# Altium PCB Wireless_Receiver.PcbDoc
Units mil, origin at the board's own origin, x right, y up, seen from the top; angles counter-clockwise.
Board outline 650 x 943.8 mil, 2 copper layers (Top Layer, Bottom Layer), stack 61.756 mil thick; 23 components, 24 nets, 103 pads, 31 vias.
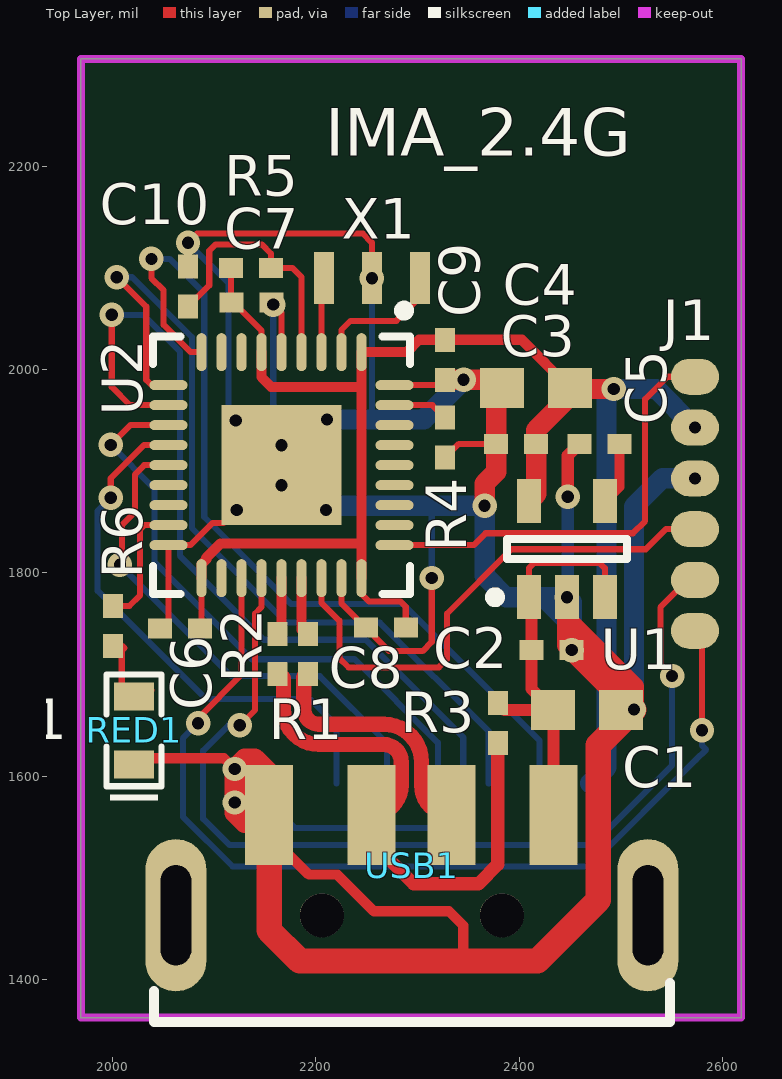
[diagram p0: Top Layer view]
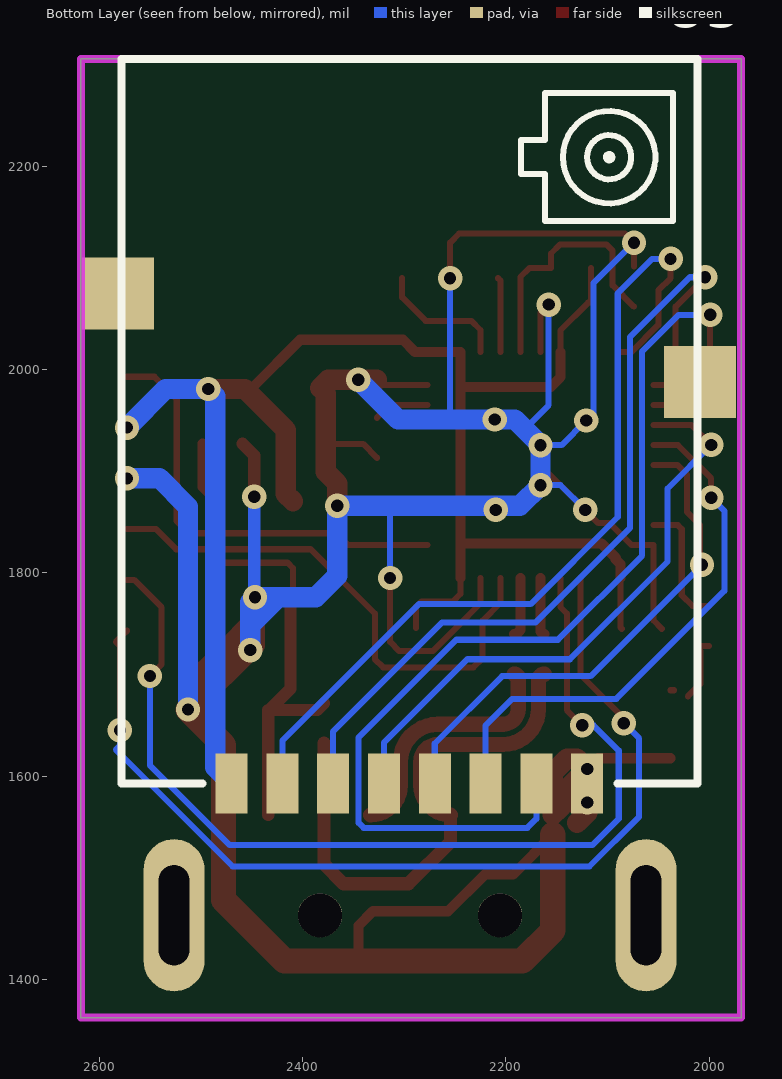
[diagram p1: Bottom Layer view, seen from below]

## Layer stack, top to bottom
Top Solder: solder mask 1, SM-001, Dk 4
Top Layer: signal copper 1.378
Dielectric 1: core 59, Core-043, Dk 4.3
Bottom Layer: signal copper 1.378
Bottom Solder: solder mask 1, SM-001, Dk 4

## Board outline
1968.5,1362.2 1968.5,2306 2618.5,2306 2618.5,1362.2

## Design rules (kind name [scope] priority, off if disabled: settings)
Clearance [All] p1: gap=5 ignorepadtopadclearanceinfootprint=FALSE
DiffPairsRouting [All] p1: maxlimit=5 minlimit=5 mostfreqgap=5 toplayer_minwidth=13 toplayer_maxwidth=16 toplayer_prefwidth=13 bottomlayer_minwidth=13 bottomlayer_maxwidth=16 bottomlayer_prefwidth=13 maxuncoupledlength=500
PolygonConnect [All] p1: connectstyle=Relief reliefconductorwidth=10 reliefentries=4 polygonreliefangle="90 Angle" airgapwidth=10
RoutingVias [All] p1: holewidth=12 width=24 viastyle="Through Hole" minholewidth=10 minwidth=20 maxholewidth=100 maxwidth=100
SolderMaskExpansion [All] p1: expansion=4 istentingtop=FALSE
Width [All] p1: maxlimit=100 minlimit=6 preferedwidth=10 minimp=50.000000 maximp=50.000000 favimp=50.000000
29 further rules are at their usual default settings.

## Classes and differential pairs
differential pair USBIN: +USBIN_P -USBIN_N

## Components (designator, comment, footprint, x,y, rotation, side; value= is the part's Value field where it differs from the comment)
C1 "10uF" Cap-0603-M 2467,1665 r180 top
C2 "104" Cap-0402-M 2432,1724 r180 top
C3 "104" Cap-0402-M 2397,1927 r0 top
C4 "10uF" Cap-0603-M 2416.46,1982 r0 top
C5 "10nF" Cap-0402-M 2479,1927 r0 top
C6 "104" Cap-0402-M 2066.31,1745 r0 top
C7 "104" Cap-0402-M 2136.32,2066 r180 top
C8 "104" Cap-0402-M 2268.68,1746 r0 top
C9 "104" Cap-0402-M 2327,2009.68 r90 top
C10 "104" Cap-0402-M 2074,2081.68 r270 top
J1 "DEBUG_POINT_6" DEBUG_POINT_6 2573,1868 r90 top
R1 "22R" Res-0402-M 2192,1720 r90 top
R2 "22R" Res-0402-M 2162,1720 r90 top
R3 "1K5" Res-0402-M 2379,1652 r90 top
R4 "10K" Res-0402-M 2327,1933 r270 top
R5 "10K" Res-0402-M 2136,2100 r180 top
R6 "4.7K" Res-0402-M 2000,1747.68 r90 top
RED1 "SYSTEM" LED_0603_R 2021,1645 r270 top
U1 "SPX3819" SOT23-5 2447,1823.24 r90 top
U2 "STM32F103T8U6" "STM-VFQFPN36_L _2" 2166,1906 r270 top locked
U3 "NRF24L01P" NRF24L01P 2295.09,1592.83 r90 bottom locked
USB1 "USB-A" USB_A/P_B 2433.9,1561.74 r0 top locked
X1 "XTAL-3P" "OSC 3213-3P" 2255,2090 r180 top

## Footprints (in the part's own frame and the unit in brackets; to place one, negate y for a bottom-side part, rotate by r counter-clockwise, add the part's x,y. Pads: shape width x height; smd on the part's side, far side on the other; paste and mask are expansions set on the pad)
Cap-0402-M [mm]
  rect 0.6x0.5 smd: 1(-0.5,0) 2(0.5,0)
  body extent -0.5,-0.25 0.5,0.25, height 0.5
Cap-0603-M [mm]
  rect 1.1x1 smd: 1(-0.85,0) 2(0.85,0)
  body extent -0.8,-0.4 0.8,0.4, height 0.6
DEBUG_POINT_6 [mm]
  oval 0.9x1.2 smd: 1(-3.175,0) 2(-1.905,0) 3(-0.635,0) 4(0.635,0) 5(1.905,0) 6(3.175,0)
LED_0603_R [mm]
  rect 0.7x1 smd: 1(-0.85,0) 2(0.85,0)
  silkscreen extent -1.4,-0.69 1.75,0.69, body extent -0.8,-0.4 0.8,0.41, height 0.61
NRF24L01P [mm]
  rect 1.8x1.8 smd: 0(10.033,-7.264) 0(12.247,7.288)
  rect 1.5x0.8 smd: 1(0,4.445) 2(0,3.175) 3(0,1.905) 4(0,0.635) 5(0,-0.635) 6(0,-1.905) 7(0,-3.175) 8(0,-4.445)
  silkscreen extent 0,-7.2 18.11,7.2, body extent 0,-7.21 18.03,7.19, height 0.8
"OSC 3213-3P" [mm] "CSTCE16M0V53-R0"
  rect 0.5x1.3 smd: 1(-1.2,0) 2(0,0) 3(1.2,0)
  body extent -1.61,-0.76 1.61,0.76, height 0.91
Res-0402-M [mm]
  rect 0.6x0.5 smd: 1(-0.5,0) 2(0.5,0)
  body extent -0.5,-0.25 0.5,0.25, height 0.38
SOT23-5 [mm]
  rect 1.1x0.6 smd: 1(-1.2,0.95) 2(-1.2,0) 3(-1.2,-0.95) 4(1.2,-0.95) 5(1.2,0.95)
  silkscreen extent -1.32,-1.5 0.25,1.92, body extent -1.4,-1.45 1.4,1.45, height 1.2
"STM-VFQFPN36_L _2" [mm] "QFN, 36-Leads, Body 6.13x6.13mm, Pitch 0.5mm, Thermal Pad 3x3mm, IPC High Density"
  oval 0.95x0.25 smd: 1(-2.825,2) 2(-2.825,1.5) 3(-2.825,1) 4(-2.825,0.5) 5(-2.825,0) 6(-2.825,-0.5) 7(-2.825,-1) 8(-2.825,-1.5) 9(-2.825,-2) 19(2.825,-2) 20(2.825,-1.5) 21(2.825,-1) 22(2.825,-0.5) 23(2.825,0) 24(2.825,0.5) 25(2.825,1) 26(2.825,1.5) 27(2.825,2)
  oval 0.25x0.95 smd: 10(-2,-2.825) 11(-1.5,-2.825) 12(-1,-2.825) 13(-0.5,-2.825) 14(0,-2.825) 15(0.5,-2.825) 16(1,-2.825) 17(1.5,-2.825) 18(2,-2.825) 28(2,2.825) 29(1.5,2.825) 30(1,2.825) 31(0.5,2.825) 32(0,2.825) 33(-0.5,2.825) 34(-1,2.825) 35(-1.5,2.825) 36(-2,2.825)
  rect 3x3 smd: 37(0,0)
  silkscreen extent -3.99,-3.21 3.21,3.21, body extent -3.07,-3.07 3.07,3.07, height 1
USB_A/P_B [mm]
  oval 1.524x3.81 hole 0.762 slot 2.5 at 90 deg: 0(-9.443,-2.508) 0(2.357,-2.508)
  round 1.1 hole 1.1: 0(-5.793,-2.508) 0(-1.293,-2.508)
  rect 1.2x2.5 smd: 1(0,0) 2(-2.556,0) 3(-4.556,0) 4(-7.112,0)
  silkscreen extent -9.99,-5.18 2.91,-4.21, body extent -9.91,-20.46 3.04,0.14, height 3.25

## Part data
C1 C2 C3 C4 C5 C6 C7 C8 C9 C10: library part CAP, "贴片陶瓷电容"
R1 R2 R3 R4 R5 R6: library part RES, "贴片电阻"
RED1: library part LED_SMD_RED, "发光二极管", Package=0603, SuppliersPartNumber=C2286, ComponentLink1Description=供应商链接, ComponentLink1URL=http://www.szlcsc.com/product/details_2659.html, Supplier=LC
U2: "ARM Cortex-M3 32-bit MCU, 64 KB Flash, 20 KB Internal RAM, 26 I/Os, 36-pin VFQFPN, -40 to 85 degC, Tray", I/Os (High Current)=26, Operating Frequency(F) (Processor speed) (MHz)=72, Supplier Part Number 1=497-11532-ND, Supply Voltage(Vcc) min (V)=2, A/D Converter="2x12-bit (10 Channel)", ComponentLink1Description="Manufacturer URL", ComponentLink1URL=http://www.st.com/web/en/home.html, ComponentLink2Description=Datasheet, ComponentLink2URL=http://www.st.com/st-web-ui/static/active/en/resource/technical/document/datasheet/CD00161566.pdf, ComponentLink3Description="Package Specification", ComponentLink3URL=http://www.st.com/st-web-ui/static/active/en/resource/technical/document/datasheet/CD00161561.pdf, Core="ARM Cortex-M3", DatasheetVersion="Rev. 16", FLASH Size (Prog) (kB)=64, Internal RAM Size (kB)=20, Mounting Technology="Surface Mount", PackageDescription="36-Pin Quad Flat No-Lead, 6 x 6 x 1.0 mm Body, 0.5 mm Pitch, Exposed Pad", PackageReference=VFQFPN36, PackageVersion="Rev. 16, 08/2013", Packing=Tray, PartNumber=STM32F103T8U6, Supplier 1=Digi-Key, Supplier 2=Farnell, Supplier 3=Newark, Supplier 4=Mouser, Supplier Part Number 2=1606329, Supplier Part Number 3=11N8298, Supplier Part Number 4=511-STM32F103T8U6
U3: "2.4G无线模块"
X1: "3脚无源晶振带电容"

## Via types
v1: diameter 24, hole 12, Top Layer to Bottom Layer, tented both sides, 31 vias

## Nets (pads, with @x,y where several pads share a name; then routed paths per layer and width w, separated by ;. In a path a pad name is that pad's centre, name@x,y a point inside that pad or via, vN(x,y) a via of type N, cw(c..) or ccw(c..) an arc to the next point about the centre after c; other vN are vias at no path point)
3V3: C3.2 C4.2 C6.2 C7.2 C8.2 C9.2 J1.5 R5.2 U1.5 U2.1 U2.6 U2.19 U2.27 U3.1 | length 1651.7
  Top Layer w6: C6.2 2087.26,1746.26 U2.19 ; R5.2 2116.31,2066.32 C7.2 2119,2066 2146.32,2038.68 U2.6 ; U2.27 2244.74,1779.26 2252,1772 2283,1772 2288.37,1766.63 C8.2
  Top Layer w10: U2.19 2087.26,1808.4 2092.02,1813.17 2092.02,1814.74 2106.28,1829 2244.74,1829 ; U2.6 2146.32,1992.68 2156,1983 2243.74,1983 2244.74,1984 ; U2.27 2244.74,1829 ; C4.2 2402.56,2029.37 C9.2 2301.37,2029.37 2289.22,2017.22 U2.1 2244.74,1984 ; 2244.74,1829 2244.74,1984
  Top Layer w20: U1.5 2416.69,1877.58 C3.2 2416.69,1940.69 2449.93,1973.93 2457,1981 v1(2493,1981)
  Bottom Layer w20: U3.1 2486,1608.75 2486,1767 2486,1974 v1(2493,1981) 2535,1981 v1(2573,1943)
5V: C1.2 C2.2 R3.2 U1.1 U1.3 USB1.1 | length 418.4
  Top Layer w6: U1.1 2409.6,1804.6 2415,1810 2479,1810 2484.4,1804.6 U1.3
  Top Layer w12: R3.2 2385.68,1665 C1.2 2433,1665 2412,1686 2412,1724 2412,1773.6 U1.1 ; USB1.1 C1.2@2433.9,1665.1
GND: C1.1 C2.1 C3.1 C4.1 C5.1 C6.1 C7.1 C8.1 C9.1 C10.1 J1.4 R4.2 RED1.2 U1.2 U2.5 U2.18 U2.26 U2.36 U2.37 U3.8 USB1.4 X1.2 | length 4347.1
  Top Layer w6: C6.1 2054.78,1753.15 U2.18 2076.26,1827.26 2098,1849 2109,1849 v1(2122,1862) U2.37 ; C10.1 v1(2074.01,2125.01) 2083,2134 2246,2134 2255,2125 v1(2255,2090) ; C7.1 v1(2157.97,2064.03) 2166,2056 U2.5 ; U2.26 2225.06,1769.94 C8.1 2272,1723 2305,1723 2314,1732 v1(2314,1795) ; U2.36 2321.74,1984.74 C9.1 ; R4.2 2340.69,1927 C3.1 ; C4.1@2377.32,1976.32 C4.1
  Top Layer w10: RED1.2@2037.99,1617.54 2109.46,1617.54 v1(2120,1607) ; USB1.4 2153.9,1542.1 2193,1503 2221,1503 2257,1467 2331,1467 2345,1453 2345,1418
  Top Layer w12: C2.1@2447,1728.68 v1(2451.68,1724) ; v1(2447.81,1874.89) 2447.81,1915.5 C5.1 ; C1.1@2500,1665.46 C1.1 2500.93,1665.46 2510.21,1665.46 v1(2513,1665.46)
  Top Layer w20: 2130,1554 2120,1564 v1(2120,1574) ; C9.1 v1(2345.32,1990) 2375,1990 C4.1 ; v1(2366,1866) 2366,1888 2377.32,1899.32 C3.1 C4.1@2377.32,1976.32 ; C2.1@2447,1728.68 2447,1753 ; v1(2447,1776) 2447,1753 ; C1.1@2510.21,1665.46 2505.11,1670.57 v1(2451.68,1724) 2477,1724 ; v1(2513,1665.46) 2513,1688 2477,1724 ; v1(2120,1574) v1(2120,1607) ; v1(2120,1574) 2141.64,1574 2148.22,1567.42 USB1.4 USB1.4@2153.9,1573.1 ; v1(2120,1607) 2130,1617 2140,1617 2153.9,1603.1 USB1.4@2153.9,1573.1 ; v1(2120,1607) 2147.32,1579.68 USB1.4@2153.9,1573.1 ; 2447,1753 2448,1753 2477,1724
  Top Layer w25: USB1.4@2153.9,1542.1 2153.9,1448.1 2184,1418 2345,1418 2418,1418 2478,1478 2478,1630.46 2506.5,1658.96 v1(2513,1665.46)
  Bottom Layer w6: v1(2074.01,2125.01) 2114,2085.01 2114,1957 v1(2121,1950) 2145.31,1925.69 v1(2166,1925.69) ; v1(2122,1862) 2146.32,1886.32 v1(2166,1886.32) ; v1(2157.97,2064.03) 2157.97,1965.03 2181.66,1941.34 ; v1(2255,2090) 2255,1954.66 2258.66,1951 ; v1(2314,1795) 2314,1865 2315,1866 ; v1(2447,1776) v1@2447.81,1776.81
  Bottom Layer w12: v1@2447.81,1776.81 v1(2447.81,1874.89)
  Bottom Layer w20: v1(2345.32,1990) 2306.32,1951 2258.66,1951 v1(2211,1951) 2191.31,1951 2181.66,1941.34 v1(2166,1925.69) v1(2166,1886.32) 2186.32,1866 2315,1866 v1(2366,1866) 2366,1797 2387,1776 2424,1776 ; v1(2451.68,1724) 2451.68,1748.32 ; v1(2513,1665.46) 2513,1865 2541,1893 v1(2573,1893) ; 2424,1776 2451.68,1748.32 ; 2424,1776 v1(2447,1776) 2451.68,1771.32 2451.68,1748.32
  other v1: 2210,1862
GPIO_CE_MCU_NRF: U2.9 U3.2 | length 867.7
  Top Layer w6: v1(2038,2109) 2038,2090.14 2050,2078.14 2050,2044 2076.78,2017.22 U2.9
  Bottom Layer w6: v1(2038,2109) 2056,2109 2090,2075 2090,1855 2175.68,1769.32 2285.69,1769.32 2420.09,1634.91 U3.2
GPIO_IRQ_NRF_MCU: U2.11 U3.7 | length 1069.9
  Top Layer w6: v1(1999,2054) 1999,1983 2016.94,1965.06 U2.11
  Bottom Layer w6: v1(1999,2054) 2030,2054 2066,2018 2066,1817 2148.81,1734.19 2248.81,1734.19 2345,1638 2345,1554 2340,1549 2179,1549 2170.09,1557.91 U3.7
GPIO_MCU_LED: R6.2 U2.17 | length 125.8
  Top Layer w6: R6.2 2016.37,1767.37 2027,1778 2027,1843 2030.94,1846.94 U2.17
NetC5_2: C5.2 U1.4 | length 62.4
  Top Layer w10: U1.4 2498.69,1884.78 C5.2
NetR4_1: R4.1 U2.35 | length 54.9
  Top Layer w6: U2.35 2314.63,1965.06 R4.1
NetR6_1: R6.1 RED1.1 | length 69.7
  Top Layer w6: R6.1 2009.65,1728 2011.62,1726.03 2008.8,1723.2 2008.8,1690.67 RED1.1 ; RED1.1@2034.53,1684.47 RED1.1@2037.99,1684.47
NRST_MCU_KEY: C10.2 R5.1 U2.4 | length 252.5
  Top Layer w6: C10.2 2095,2082.99 2095,2117 2101,2123 2147,2123 2155.68,2114.32 R5.1 2177,2100 2185.69,2091.32 U2.4
OSC_MCU_XTAL: U2.3 X1.3 | length 73.8
  Top Layer w6: U2.3 2205.37,2087.61 X1.3
OSC_XTAL_MCU: U2.2 X1.1 | length 131.1
  Top Layer w6: U2.2 2225.06,2039.06 2234,2048 2279,2048 2302.24,2071.24 X1.1
SPI_CSN_MCU_NRF: U2.10 U3.3 | length 849.5
  Top Layer w6: v1(2004,2091) 2033,2062 2033,1990 2038.26,1984.74 U2.10
  Bottom Layer w6: v1(2004,2091) 2019,2091 2078,2032 2078,1844 2171,1751 2263,1751 2370.09,1643.91 U3.3
SPI_MISO_NRF_MCU: U2.13 U3.6 | length 533.4
  Top Layer w6: v1(1998,1874) 1998,1893 2030.69,1925.69 U2.13
  Bottom Layer w6: v1(1998,1874) 1985,1861 1985,1782.37 2091.37,1676 2194,1676 2220.09,1649.91 U3.6
SPI_MOSI_MCU_NRF: U2.14 U3.5 | length 508.1
  Top Layer w6: v1(2007,1808) 2009,1808 2009,1847 2022,1860 2022,1897 2031,1906 U2.14
  Bottom Layer w6: v1(2007,1808) 2116.65,1698.35 2203.81,1698.35 2270.09,1632.07 U3.5
SPI_SCK_MCU_NRF: U2.12 U3.4 | length 590.5
  Top Layer w6: v1(1998,1926) 2017.37,1945.37 U2.12
  Bottom Layer w6: v1(1998,1926) 2041,1883 2041,1811 2137,1715 2238,1715 2320.09,1632.91 U3.4
SWCLK_MCU_DEBUGER: J1.3 U2.25 | length 522.5
  Top Layer w6: U2.25 2205.37,1770.63 2223,1753 2223,1716 2232,1707 2321,1707 2329,1715 2329,1760 2392.24,1823.24 2524.59,1823.24 2544.35,1843 J1.3
SWDIO_MCU_DEBUGER: J1.6 U2.28 | length 434.7
  Top Layer w6: U2.28 2355.26,1827.26 2367,1839 2512,1839 2524,1851 2524,1971 2546,1993 J1.6
UART_RX_DEBUGER_MCU: J1.2 U2.22 | length 977.2
  Top Layer w6: v1(2125,1650) 2140,1665 2140,1760 2146.32,1766.32 U2.22 ; v1(2550.5,1698.5) 2539,1710 2539,1766 2566,1793 J1.2
  Bottom Layer w6: v1(2125,1650) 2114,1650 2089,1625 2089,1558 2115,1532 2472,1532 2550.5,1610.5 v1(2550.5,1698.5)
UART_TX_MCU_DEBUGER: J1.1 U2.21 | length 966.5
  Top Layer w6: v1(2084,1652) 2084,1657 2126.63,1699.63 U2.21 ; J1.1 2574,1742 2584,1732 2580,1728 v1(2580,1645)
  Bottom Layer w6: v1(2084,1652) 2069,1637 2069,1560 2118,1511 2469,1511 2574,1616 2584,1626 2580,1630 v1(2580,1645)
USB_MCU_TYPEC_N: R2.2 U2.23 | length 57.4
  Top Layer w10: R2.2 ccw(c2162,1743.69) 2166,1743.69 U2.23
USB_MCU_TYPEC_P: R1.2 U2.24 | length 58.7
  Top Layer w10: U2.24 2185.69,1746 ccw(c2192,1746) R1.2
USBIN_N: R2.1 R3.1 USB1.3 | length 547.4
  Top Layer w13: USB1.3 2254.53,1535.47 2296,1494 2360,1494 2379,1513 R3.1
  Top Layer w15: R2.1 cw(c2162,1694.31) 2168,1694.31 2168,1666 ccw(c2203,1666) 2203,1631 2266.9,1631 cw(c2266.9,1614) 2283.9,1614 2283.9,1591.11 cw(c2254.53,1591.11) USB1.3
USBIN_P: R1.1 USB1.2 | length 251.2
  Top Layer w15: R1.1 ccw(c2192,1696.32) 2188,1696.32 2188,1666 ccw(c2203,1666) 2203,1651 2266.9,1651 cw(c2266.9,1614) 2303.9,1614 2303.9,1591.11 ccw(c2333.27,1591.11) USB1.2
pads on no net: U2.7 U2.8 U2.15 U2.16 U2.20 U2.29 U2.30 U2.31 U2.32 U2.33 U2.34 U3.0 USB1.0

## Keep-outs
Keep-Out Layer:
  the board outline again, w7.87

## Silkscreen, mask and mechanical layers (free items; w line width, h text height)
Top Overlay:
  text "IMA_2.4G" at 2209,2195.16 h80